# Altium PCB Relay.PcbDoc
Units mm, origin at the board's own origin, x right, y up, seen from the top; angles counter-clockwise.
Board outline 85.72 x 48.13 mm, 2 copper layers (Top Layer, Bottom Layer); 41 components, 40 nets, 181 pads, 0 vias.
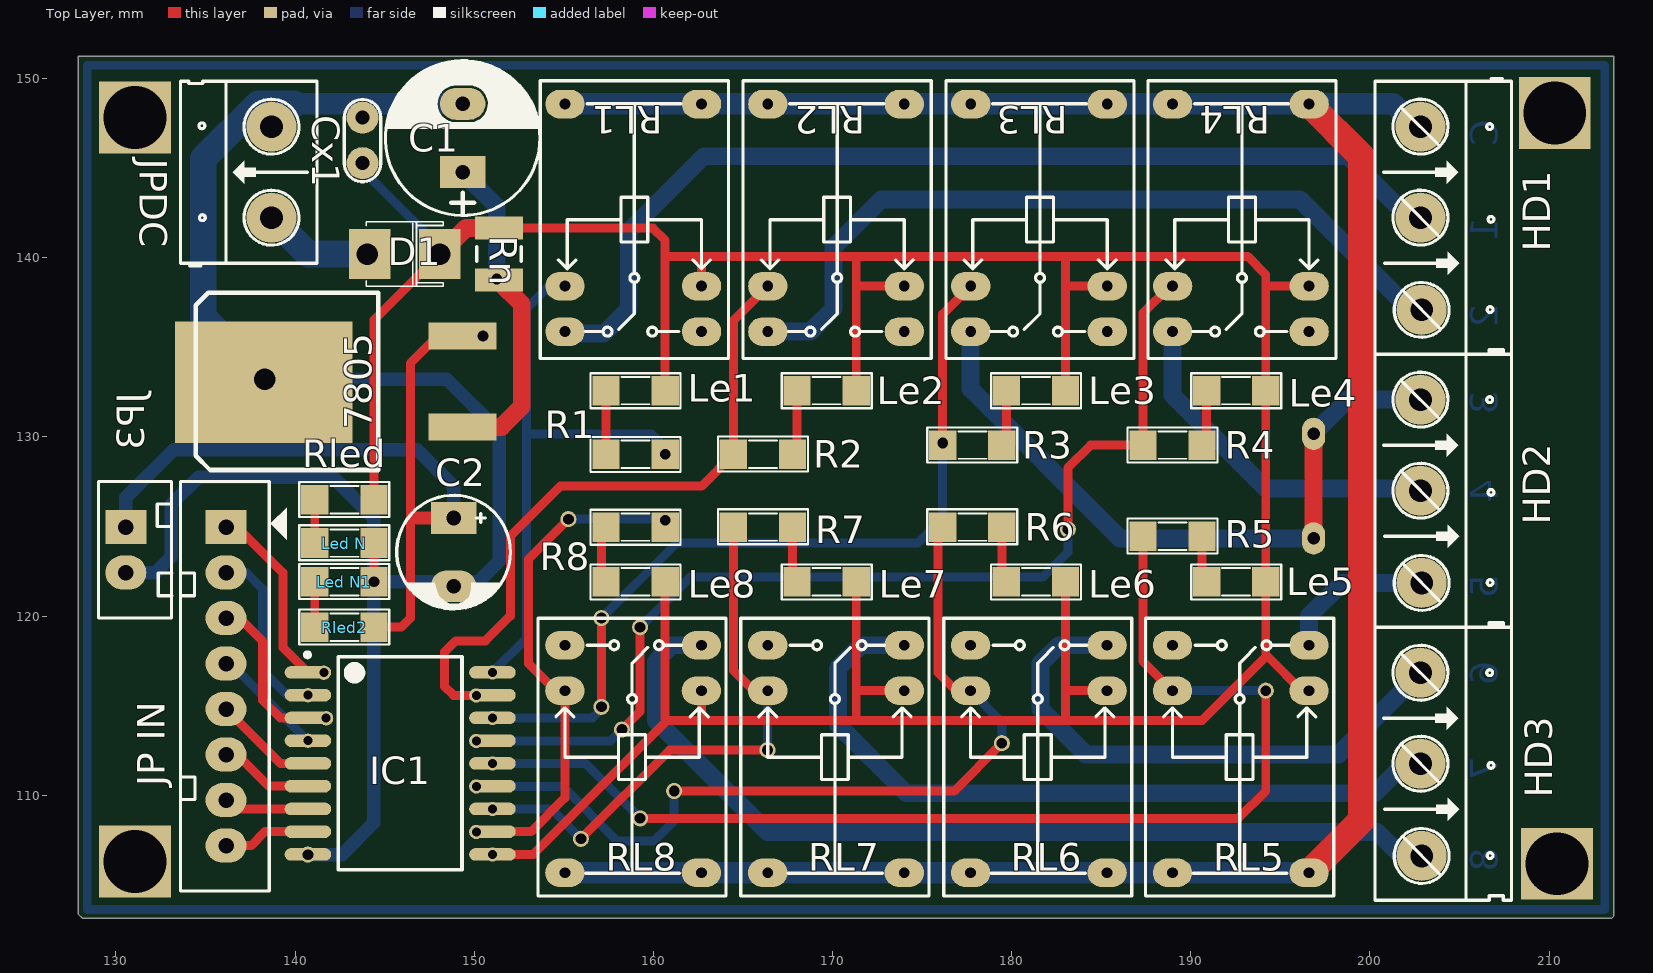
[diagram p0: Top Layer view]
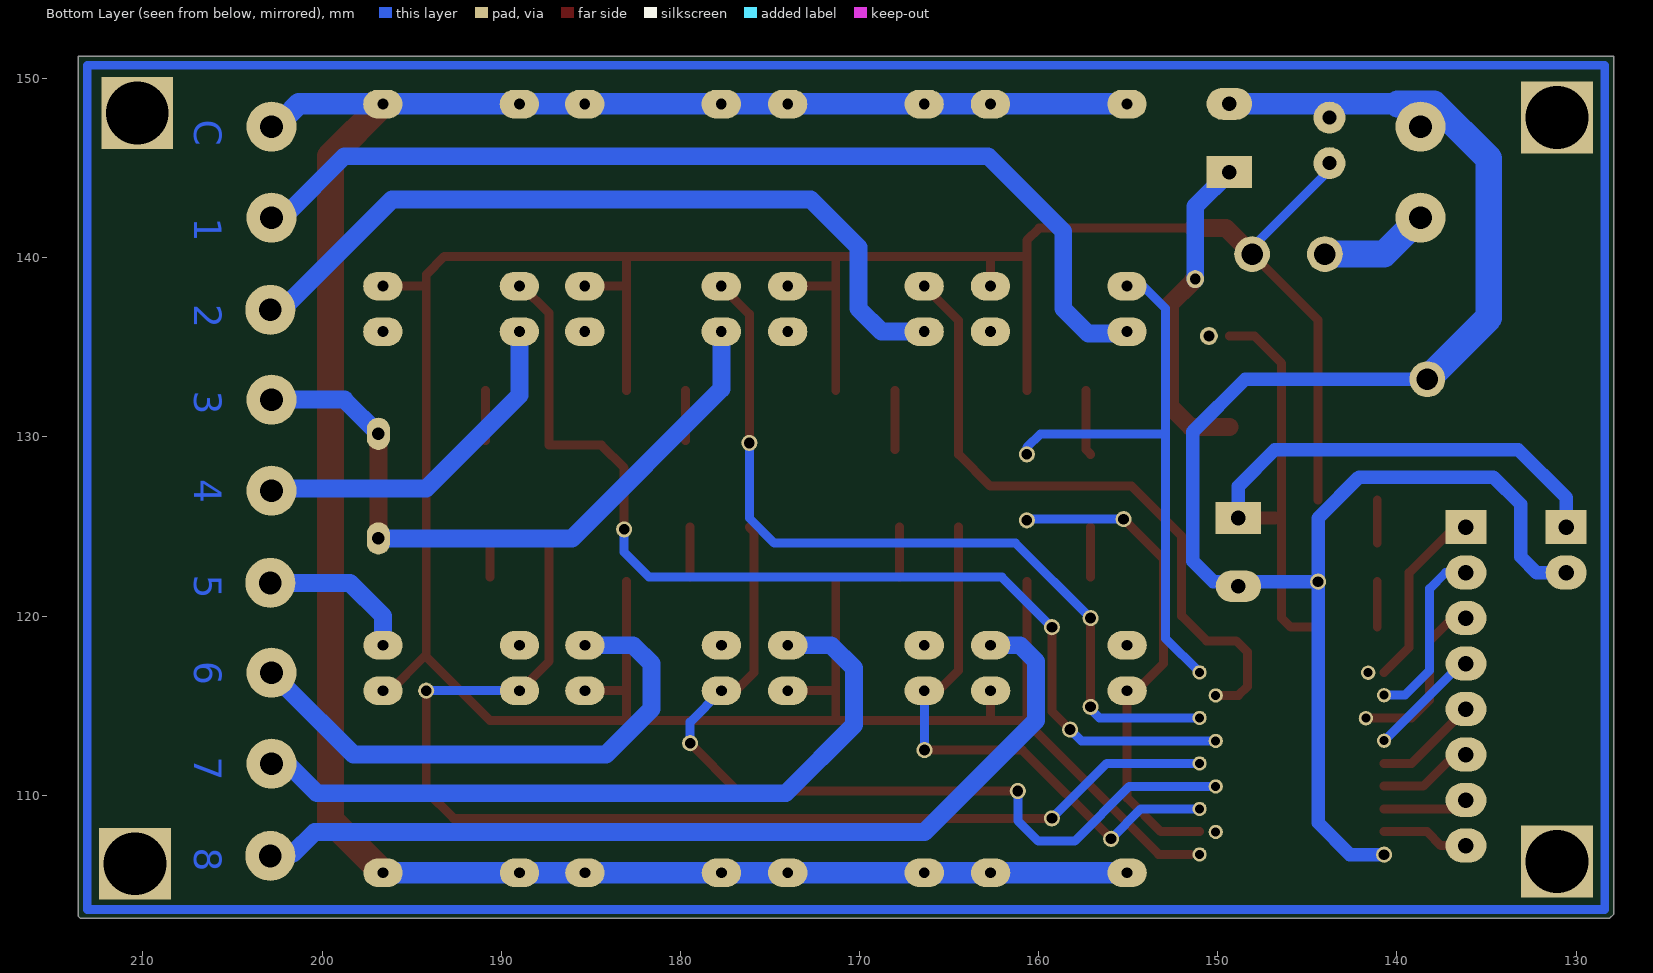
[diagram p1: Bottom Layer view, seen from below]
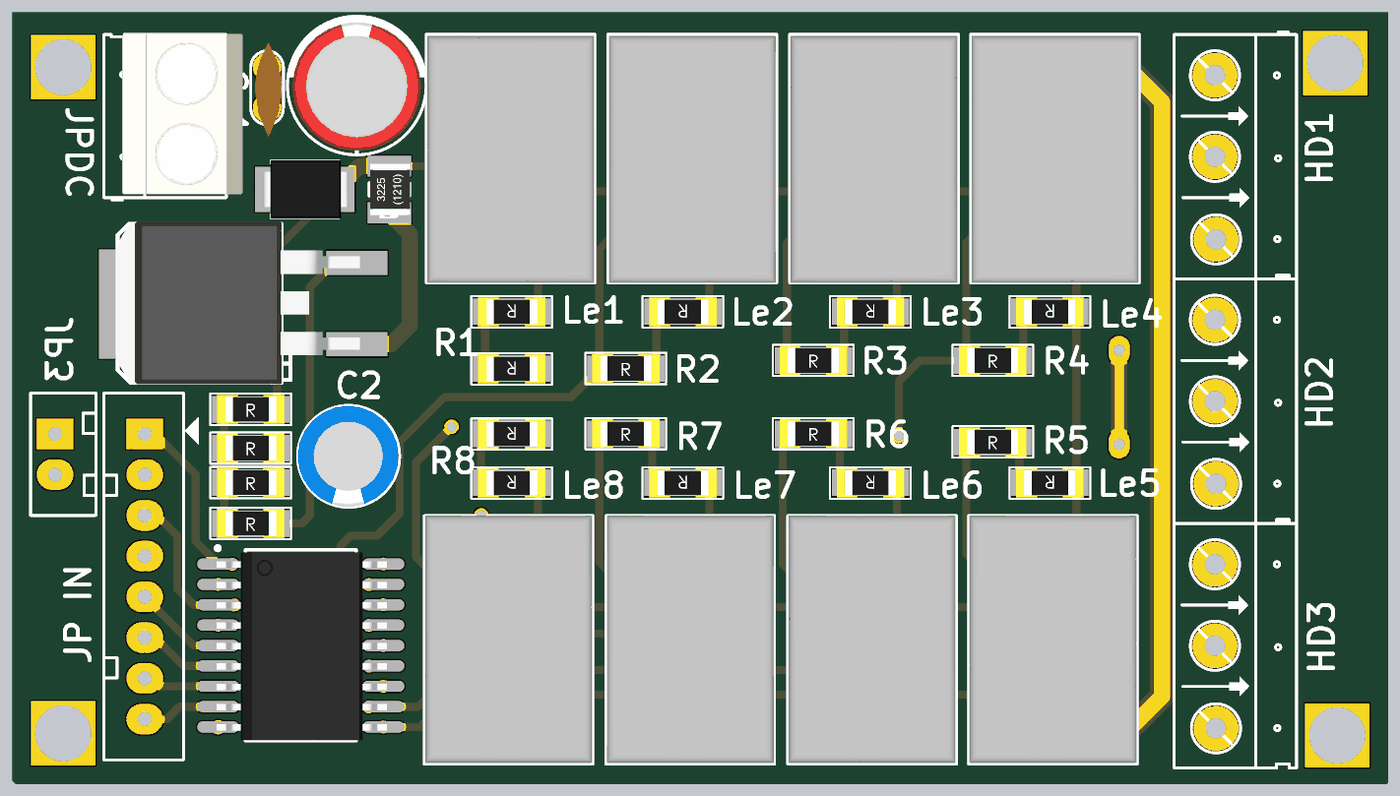
[diagram p2: 3D render of the assembled board from above, using the file's embedded part models]

## Layer stack, top to bottom
Top Layer: signal copper 0.0356
Dielectric: core 0.32, FR-4, Dk 4.8
Bottom Layer: signal copper 0.0356

## Board outline
127.889,151.257 213.614,151.257 213.614,103.251 213.487,103.124 208.153,103.124 128.143,103.124 127.889,103.378 127.889,151.257

## Design rules (kind name [scope] priority, off if disabled: settings)
AssemblyTestPointUsage AssemblyTestPointUsage_1 [All] p2:
AssemblyTestpoint AssemblyTestpoint_1 [All] p2: testpointundercomponent=TRUE minsize=1.016 maxsize=2.54 preferedsize=1.524 minholesize=0 maxholesize=1.016 preferedholesize=0.813 testpointgrid=0.025 usegrid=TRUE gridtolerance=0 allowsidetop=TRUE allowsidebottom=TRUE
Clearance [All] p1: gap=0.2
ComponentClearance ComponentClearance_1 [All] p2: gap=0.254 collisioncheckmode=3 verticalgap=0.254 showdistances=FALSE
DiffPairsRouting DiffPairsRouting_1 [All] p2: maxlimit=0.254 minlimit=0.254 mostfreqgap=0.254 maxuncoupledlength=12.7
FabricationTestPointUsage TestPointUsage [All] p2: valid=0 allowmultiple=FALSE
FabricationTestpoint Testpoint [All] p2: side=3 testpointundercomponent=TRUE minsize=1.016 maxsize=2.54 preferedsize=1.524 minholesize=0 maxholesize=1.016 preferedholesize=0.813 testpointgrid=0.025 allowsidetop=TRUE allowsidebottom=TRUE usegrid=TRUE gridtolerance=0
FanoutControl Fanout_LCC [IsLCC] p1: bgadir=Out bgaviamode=Centered fanoutstyle=Auto fanoutdirection=Alternating viagrid=0.025 // Fanout_LCC (Default Rule)
FanoutControl Fanout_BGA [IsBGA] p2: bgadir=Out bgaviamode=Centered fanoutstyle=Auto fanoutdirection=Alternating viagrid=0.025 // Fanout_BGA (Default Rule)
FanoutControl Fanout_Small [(CompPinCount < 5)] p3: bgadir=Out bgaviamode=Centered fanoutstyle=Auto fanoutdirection=OutThenIn viagrid=0.025 // Fanout_Small (Default Rule)
FanoutControl Fanout_SOIC [IsSOIC] p4: bgadir=Out bgaviamode=Centered fanoutstyle=Auto fanoutdirection=Alternating viagrid=0.025 // Fanout_SOIC (Default Rule)
FanoutControl Fanout_BGA_1 [IsBGA] p6: bgadir=Out bgaviamode=Centered fanoutstyle=Auto fanoutdirection=Alternating viagrid=0.025 // Fanout_BGA (Default Rule)
FanoutControl Fanout_LCC_1 [IsLCC] p7: bgadir=Out bgaviamode=Centered fanoutstyle=Auto fanoutdirection=Alternating viagrid=0.025 // Fanout_LCC (Default Rule)
FanoutControl Fanout_SOIC_1 [IsSOIC] p8: bgadir=Out bgaviamode=Centered fanoutstyle=Auto fanoutdirection=Alternating viagrid=0.025 // Fanout_SOIC (Default Rule)
FanoutControl Fanout_Small_1 [(CompPinCount < 5)] p9: bgadir=Out bgaviamode=Centered fanoutstyle=Auto fanoutdirection=OutThenIn viagrid=0.025 // Fanout_Small (Default Rule)
FanoutControl Fanout_Default_1 [All] p10: bgadir=Out bgaviamode=Centered fanoutstyle=Auto fanoutdirection=Alternating viagrid=0.025 // Fanout_Default (Default Rule)
Height Height_1 [All] p2: minheight=0 maxheight=25.4 prefheight=12.7
HoleSize HoleSize_1 [All] p2: absolutevalues=TRUE maxlimit=2.54 minlimit=0.025 maxpercent=80.000 minpercent=20.000
HoleToHoleClearance HoleToHoleClearance_1 [All] p2: gap=0.254 allowstackedmicrovias=TRUE
LayerPairs LayerPairs_1 [All] p2: enforce=TRUE
MinimumSolderMaskSliver MinimumSolderMaskSliver_1 [All] p2: minsoldermaskwidth=0.254
NetAntennae NetAntennae_1 [All] p2: netantennaetolerance=0
PasteMaskExpansion PasteMaskExpansion_1 [All] p2: expansion=0
PlaneClearance PlaneClearance_1 [All] p2: clearance=0.508
PolygonConnect [All] p1: connectstyle=Relief reliefconductorwidth=0.254 reliefentries=4 polygonreliefangle="90 Angle"
PolygonConnect PolygonConnect_1 [All] p2: connectstyle=Relief reliefconductorwidth=0.254 reliefentries=4 polygonreliefangle="90 Angle"
RoutingPriority RoutingPriority_1 [All] p2: routingpriority=0
RoutingTopology RoutingTopology_1 [All] p2: topology=Shortest
RoutingVias [All] p1: holewidth=0.6 width=1 viastyle="Through Hole" minholewidth=0.711 minwidth=1.27 maxholewidth=0.711 maxwidth=1.27
ShortCircuit ShortCircuit_1 [All] p2: allowed=FALSE
SilkToSilkClearance SilkToSilkClearance_1 [All] p2: silktosilkclearance=0.254
SilkscreenOverComponentPads [All] p1: minsilkscreentomaskgap=0.254
SilkscreenOverComponentPads SilkscreenOverComponentPads_1 [All] p2: minsilkscreentomaskgap=0.254
SolderMaskExpansion [All] p1: expansion=0.102
SolderMaskExpansion SolderMaskExpansion_1 [All] p2: expansion=0.102
UnRoutedNet UnRoutedNet_1 [All] p2:
Width [All] p1: maxlimit=1.5 minlimit=0.3 preferedwidth=1.5
23 further rules are at their usual default settings.

## Components (designator, comment, footprint, x,y, rotation, side; value= is the part's Value field where it differs from the comment)
7805 "Volt Reg" TO-263 149.352,130.556 r90 top
C1 "1000uF/16V" CP1.5/3.4 149.352,144.78 r90 top
C2 "100uF/35V" CP1.5/2.5 148.844,125.476 r270 top
Cx1 "33pF" CN1 143.764,147.828 r270 top
D1 "1N4007" "SM-DIODE 1A" 144.272,140.208 r0 top
HD1 "Header 3" HED3 202.819,147.32 r270 top
HD2 "Header 3" HED3 202.819,132.08 r270 top
HD3 "Header 3" HED3 202.819,116.84 r270 top
IC1 "ULN2803A" SO-18 140.716,116.84 r0 top
JP3 "JP2" CON2 130.556,124.968 r270 top
"JP IN" "JP8" CON8 136.144,124.968 r270 top
JPDC "JP2" HED2 138.684,142.24 r90 top
Le1 "LED" SM-1206 159.004,132.588 r180 top
Le2 "LED" SM-1206 169.672,132.588 r180 top
Le3 "LED" SM-1206 181.356,132.588 r180 top
Le4 "LED" SM-1206 192.532,132.588 r180 top
Le5 "LED" SM-1206 192.532,121.92 r180 top
Le6 "LED" SM-1206 181.356,121.92 r180 top
Le7 "LED" SM-1206 169.672,121.92 r180 top
Le8 "LED" SM-1206 159.004,121.92 r180 top
"Led N" "LED" SM-1206 142.748,124.079 r0 top
"Led N1" "LED" SM-1206 142.748,121.92 r0 top
R1 "10k" SM-1206 159.004,129.032 r180 top
R2 "10k" SM-1206 166.116,129.032 r0 top
R3 "10k" SM-1206 177.8,129.54 r0 top
R4 "10k" SM-1206 188.976,129.54 r0 top
R5 "10k" SM-1206 188.976,124.46 r0 top
R6 "10k" SM-1206 177.8,124.968 r0 top
R7 "10k" SM-1206 166.116,124.968 r0 top
R8 "10k" SM-1206 159.004,124.968 r180 top
RL1 "HK4100F" RL_SPDT_3A 162.687,138.43 r90 top
RL2 "HK4100F" RL_SPDT_3A 174.009,138.43 r90 top
RL3 "HK4100F" RL_SPDT_3A 185.331,138.43 r90 top
RL4 "HK4100F" RL_SPDT_3A 196.603,138.43 r90 top
RL5 "HK4100F" RL_SPDT_3A 188.976,115.824 r270 top
RL6 "HK4100F" RL_SPDT_3A 177.704,115.824 r270 top
RL7 "HK4100F" RL_SPDT_3A 166.382,115.824 r270 top
RL8 "HK4100F" RL_SPDT_3A 155.06,115.824 r270 top
Rled "1k" SM-1206 142.748,126.492 r0 top
Rled2 "1k" SM-1206 142.748,119.38 r0 top
Rn "100" SM-3225N 151.384,140.208 r90 top

## Footprints (in the part's own frame and the unit in brackets; to place one, negate y for a bottom-side part, rotate by r counter-clockwise, add the part's x,y. Pads: shape width x height; smd on the part's side, far side on the other; paste and mask are expansions set on the pad)
CN1 [mil]
  round 70 hole 31: 1(0,0) 2(100,0)
  silkscreen extent -40,-40 141,40, body extent -60,-30 170,37, height 265
CON2 [mil] "CON2"
  rect 75x90 hole 34: 1(0,0)
  oval 75x90 hole 34: 2(100,0)
  silkscreen extent -100,-60 200,101
CON8 [mil] "CON8"
  rect 75x90 hole 34: 1(0,0)
  oval 75x90 hole 34: 2(100,0) 3(200,0) 4(300,0) 5(400,0) 6(500,0) 7(600,0) 8(700,0)
  silkscreen extent -100,-100 800,133
CP1.5/2.5 [mil] "Tu hoa 33 >100 uF,50V, 220uF/16V,25V ( it su dung )"
  rect 70x100 hole 32: 1(0,0)
  oval 70x100 hole 32: 2(150,0)
  silkscreen extent -50,-125 200,125, body extent -49,-125 199,123, height 422
CP1.5/3.4 [mil] "Tu hoa 220->470uF,16V, 470uF/16V,25V"
  rect 70x100 hole 32: 1(0,0)
  oval 70x100 hole 32: 2(150,0)
  silkscreen extent -95,-170 245,170, body extent -85,-157 230,157, height 446
HED2 [mil] "Header 2, 2 pin, hight 300mil, Pin to Pin 200, Colour Green"
  round 110 hole 50: 1(0,0) 2(200,0)
  silkscreen extent -106,-100 300,200, body extent -92,-140 302,155, height 394
HED3 [mil] "Header 3, 3 pin, hight 300mil, Pin to Pin 200, Colour Green"
  round 110 hole 50: 1(0,0) 2(200,0) 3(402.62,2.62)
  silkscreen extent -106,-100 500,200
RL_SPDT_3A [mm] "6 PIN RL"
  oval 1.6x2.2 hole 0.6: 1(-2.55,0) 2(-0.01,0) 3(10.15,0) 4(10.15,7.62) 5(-0.01,7.62) 6(-2.55,7.62)
  silkscreen extent -4.05,-1.5 11.45,9, body extent -4.05,-1.45 11.35,8.95, height 2.5
SM-1206 [mil] "Compoment SMD 120x60mil"
  rect 60x65 smd: 1(-65,0) 2(65,0)
  silkscreen extent -99,-38 99,39, body extent -83,-35 83,36, height 25
SM-3225N [mm] "Chip Capacitor, Body 3.2x2.5mm, IPC Medium Density"
  rect 1.3x2.7 smd: 1(-1.45,0) 2(1.45,0)
  silkscreen extent -0.4,-1.25 0.4,1.25, body extent -1.6,-1.3 1.6,1.2, height 0.55
"SM-DIODE 1A" [mm] "M7"
  rect 2.3x2.8 smd: 1(-0.1,0) 2(3.8,0)
  silkscreen extent -0.3,-1.8 4,1.8, body extent -0.75,-1.8 4.55,1.8, height 2.4
SO-18 [mm] "SOIC-18-300"
  oval 2.6x0.7 smd: 1(0,0.015) 2(0,-1.255) 3(0,-2.525) 4(0,-3.795) 5(0,-5.065) 6(0,-6.335) 7(0,-7.605) 8(0,-8.875) 9(0,-10.145) 10(10.3,-10.145) 11(10.3,-8.875) 12(10.3,-7.605) 13(10.3,-6.335) 14(10.3,-5.065) 15(10.3,-3.795) 16(10.3,-2.525) 17(10.3,-1.255) 18(10.3,0.015)
  silkscreen extent -0.15,-11 8.6,1.12, body extent -0.1,-10.97 10.5,0.77, height 2.67
TO-263 [mm] "SMD-DPAK"
  rect 1.5x3.8 smd: 1(0,0) 3(5.08,0)
  rect 6.8x9.9 smd: 2(2.5,11.1)
  silkscreen extent -2.4,4.7 7.5,14.9, body extent -2.5,-0.23 7.66,15.03

## Part data
7805: "Voltage Regulator"
C1: library part CP4, "Cap 1000uF/16V - 220uF/50V"
C2: library part CP3, "Cap 100uF/35V - 470uF/16V"
Cx1: library part CN0, "Cremic For Xtal 1pF => 100pF"
HD1 HD2 HD3: library part Hed3, "Header 3 (Green)"
IC1: "High-Voltage, High-Current Darlington Array"
JP3 JPDC: library part Con2, "Connector 2"
"JP IN": library part Con8, "Connector 8"
Le1 Le2 Le3 Le4 Le5 Le6 Le7 Le8 "Led N" "Led N1": "LED Single colour Green and Red"
R1 R2 R3 R4 R5 R6 R7 R8 Rled Rled2: library part R1/4W, "Resistor 1/4W"
RL1 RL2 RL3 RL4 RL5 RL6 RL7 RL8: library part "Relay 3", "HK4100F-12V"
Rn: library part R1W, "Resistor 1W"

## Free pads (board coordinates)
  oval 1.3x1.8 hole 0.7: 0(196.85,130.175) 1(196.85,124.333)
  rect 4x4 hole 3.5: 0(210.312,148.082) 1(210.439,106.172) 2(131.064,106.299) 3(131.064,147.828)
  round 2 hole 1.2: 1(144.018,140.208) 2(148.082,140.208) 3(138.303,133.223)
  round 0.9 hole 0.6: 1(144.399,121.92) 2(183.134,124.841) 4(140.716,106.68) 5(194.183,115.834) 6(159.258,108.712) 7(179.451,112.903) 8(161.163,110.236) 9(166.37,112.522) 10(155.956,107.569) 11(160.655,129.032) 12(158.242,113.665) 13(159.258,119.38) 15(157.099,114.935) 16(157.099,119.888) 17(176.149,129.667) 18(155.257,125.412) 19(160.655,125.349)
  round 0.8 hole 0.5: 4(140.716,113.045) 5(141.732,114.3) 6(140.716,115.585) 7(141.605,116.84) 8(151.016,116.855) 9(150.114,115.57) 10(151.016,114.315) 11(150.114,113.03) 12(151.016,111.775) 13(150.114,110.49) 14(151.016,109.235) 15(150.114,107.95) 16(151.016,106.695)
  round 1 hole 0.6: 4(150.495,135.636) 5(151.257,138.811)

## Nets (pads, with @x,y where several pads share a name; then routed paths per layer and width w, separated by ;. In a path a pad name is that pad's centre, name@x,y a point inside that pad or via, vN(x,y) a via of type N, cw(c..) or ccw(c..) an arc to the next point about the centre after c; other vN are vias at no path point)
GND: 7805.2 "Led N1.2" "Led N.2" C1.2 C2.2 Cx1.1 IC1.9 JP3.2 JPDC.2 pad.1@144.399,121.92 pad.3@138.303,133.223 pad.4@140.716,106.68 | length 100.8
  Top Layer w0.5: pad.1@144.399,121.92 144.399,124.079
  Bottom Layer w0.75: JP3.2 132.207,122.428 133.096,123.317 133.096,126.238 134.62,127.762 142.113,127.762 144.399,125.476 pad.1@144.399,121.92 ; pad.3@138.303,133.223 148.463,133.223 151.384,130.302 151.384,123.063 150.241,121.92 pad.1@144.399,121.92 ; pad.4@140.716,106.68 142.621,106.68 144.399,108.458 pad.1@144.399,121.92
  Bottom Layer w1.2: 139.954,148.59 C1.2
  Bottom Layer w1.5: pad.3@138.303,133.223 134.874,136.652 134.874,145.542 137.922,148.59 139.954,148.59
Net7805_1: 7805.1 C1.1 pad.5@151.257,138.811 Rn.1 | length 18.1
  Top Layer w1: 7805.1 149.86,130.556 151.511,130.556 152.654,131.699 152.654,137.414 151.384,138.684 Rn.1
  Bottom Layer w1: C1.1 151.257,142.875 pad.5@151.257,138.811
Net7805_3: 7805.3 C2.1 JP3.1 pad.4@150.495,135.636 Rled2.2 | length 45.7
  Top Layer w0.5: Rled2.2 145.923,119.38 146.431,119.888 146.431,134.112 147.955,135.636 7805.3
  Top Layer w0.75: 146.812,125.476 C2.1
  Bottom Layer w0.75: JP3.1 130.556,126.619 133.223,129.286 146.812,129.286 148.844,127.254 C2.1
NetD1_1: D1.1 JPDC.1 pad.1@144.018,140.208 | length 6
  Bottom Layer w1.5: JPDC.1 140.716,140.208 pad.1@143.891,140.208
NetHD1_1: HD1.1 RL1.3 RL1.4 RL2.3 RL2.4 RL3.3 RL3.4 RL4.3 RL4.4 RL5.3 RL5.4 RL6.3 RL6.4 RL7.3 RL7.4 RL8.3 RL8.4 | length 134.8
  Top Layer w1.5: RL5.4 199.517,108.595 199.517,145.669 RL4.3@196.606,148.58
  Bottom Layer w1.2: RL8.3@154.813,105.674 RL5.4 ; RL1.4@155.067,148.59 201.295,148.59 202.057,147.828 HD1.1@202.057,147.447
NetHD1_2: HD1.2 RL1.6 | length 54.5
  Bottom Layer w1: RL1.6@155.575,135.763 157.226,135.763 158.623,137.16 158.623,141.478 162.814,145.669 198.755,145.669 HD1.2@202.057,142.367
NetHD1_3: HD1.3 RL2.6 | length 43.3
  Bottom Layer w1: RL2.6 168.773,135.88 170.053,137.16 170.053,140.589 172.72,143.256 196.088,143.256 HD1.3@202.124,137.22
NetHD2_1: HD2.1 pad.0@196.85,130.175 pad.1@196.85,124.333 RL3.6 | length 38.4
  Top Layer w1: pad.1@196.85,124.333 pad.0@196.85,130.175
  Bottom Layer w1: RL3.6 177.711,132.677 186.055,124.333 pad.1@196.85,124.333 ; pad.0@196.85,130.175 198.755,132.08 HD2.1
NetHD2_2: HD2.2 RL4.6 | length 18.7
  Bottom Layer w1: RL4.6 188.983,132.327 194.183,127.127 201.676,127.127 HD2.2@201.923,126.88
NetHD2_3: HD2.3 RL5.6 | length 8.7
  Bottom Layer w1: RL5.6 196.596,120.015 198.434,121.853 HD2.3
NetHD3_1: HD3.1 RL6.6 | length 30.6
  Bottom Layer w1: RL6.6 182.636,118.374 181.61,117.348 181.61,114.808 184.15,112.268 198.247,112.268 202.057,116.078 HD3.1@202.057,116.967
NetHD3_2: HD3.2 RL7.6 | length 41.5
  Bottom Layer w1: RL7.6 171.587,118.374 170.307,117.094 170.307,113.919 174.117,110.109 200.279,110.109 HD3.2@202.057,111.887
NetHD3_3: HD3.3 RL8.6 | length 51.3
  Bottom Layer w1: RL8.6 161.046,118.374 160.147,117.475 160.147,114.173 166.37,107.95 200.406,107.95 201.616,106.74 HD3.3@202.124,106.74
NetIC1_1: "JP IN.1" IC1.1 pad.7@141.605,116.84 | length 10.4
  Top Layer w0.5: 136.144,124.968 136.779,124.968 139.319,122.428 139.319,118.252 IC1.1
NetIC1_2: "JP IN.2" IC1.2 pad.6@140.716,115.585 | length 10.1
  Bottom Layer w0.5: 136.144,122.428 137.287,122.428 138.176,121.539 138.176,116.967 139.558,115.585 pad.6@140.716,115.585
NetIC1_3: "JP IN.3" IC1.3 pad.5@141.732,114.3 | length 9.8
  Top Layer w0.5: 136.144,119.888 136.906,119.888 138.176,118.618 138.176,115.316 139.192,114.3 pad.5@141.732,114.3
NetIC1_4: "JP IN.4" IC1.4 pad.4@140.716,113.045 | length 6.4
  Bottom Layer w0.5: 136.144,117.348 136.413,117.348 pad.4@140.716,113.045
NetIC1_5: "JP IN.5" IC1.5 | length 5.8
  Top Layer w0.5: 136.144,114.808 139.177,111.775 IC1.5
NetIC1_6: "JP IN.6" IC1.6 | length 5.3
  Top Layer w0.5: 136.144,112.268 136.779,112.268 138.542,110.505 IC1.6
NetIC1_7: "JP IN.7" IC1.7 | length 4.8
  Top Layer w0.5: 136.144,109.728 136.637,109.235 IC1.7
NetIC1_8: "JP IN.8" IC1.8 | length 4.9
  Top Layer w0.5: 136.144,107.188 137.541,107.188 138.318,107.965 IC1.8
NetIC1_11: IC1.11 pad.15@150.114,107.95 pad.18 pad.19 R8.1 RL8.2 | length 27.5
  Top Layer w0.5: IC1.11 153.177,107.965 155.06,109.848 155.06,115.323 153.035,117.348 153.035,123.19 pad.18
  Bottom Layer w0.5: pad.18 pad.19@160.591,125.412
NetIC1_12: IC1.12 pad.9@166.37,112.522 pad.10@155.956,107.569 pad.14 R7.1 RL7.2 | length 31.8
  Top Layer w0.5: pad.10@155.956,107.569 160.909,112.522 pad.9@166.37,112.522 ; R7.1 164.465,116.967 165.598,115.834 RL7.2
  Bottom Layer w0.5: pad.14 154.29,109.235 pad.10@155.956,107.569 ; pad.9@166.382,112.534 RL7.2
NetIC1_13: IC1.13 pad.7@179.451,112.903 pad.8@161.163,110.236 pad.13@150.114,110.49 R6.1 RL6.2 | length 47.9
  Top Layer w0.5: pad.8@161.163,110.236 176.784,110.236 pad.7@179.451,112.903 ; R6.1 175.895,124.714 175.895,116.84 176.901,115.834 RL6.2
  Bottom Layer w0.5: pad.13@150.114,110.49 154.94,110.49 157.988,107.442 160.02,107.442 161.163,108.585 pad.8@161.163,110.236 ; RL6.2 179.451,114.087 pad.7@179.451,112.903
NetIC1_14: IC1.14 pad.5@194.183,115.834 pad.6@159.258,108.712 pad.12@151.016,111.775 R5.1 RL5.2 | length 65.2
  Top Layer w0.5: pad.6@159.258,108.712 192.659,108.712 194.183,110.236 pad.5@194.183,115.834 ; R5.1 187.325,117.485 RL5.2
  Bottom Layer w0.5: pad.12@151.016,111.775 156.195,111.775 pad.6@159.258,108.712 ; RL5.2 pad.5@194.183,115.834
NetIC1_15: IC1.15 pad.2@183.134,124.841 pad.11@150.114,113.03 pad.12@158.242,113.665 pad.13@159.258,119.38 R4.1 RL4.5 | length 59.3
  Top Layer w0.5: pad.12@158.369,113.538 158.369,113.792 159.258,114.681 pad.13@159.258,119.38 ; pad.2@183.134,124.841 183.134,128.27 184.404,129.54 R4.1 187.325,136.906 188.839,138.42 RL4.5
  Bottom Layer w0.5: pad.11@150.114,113.03 157.607,113.03 pad.12@158.242,113.665 ; pad.13@159.258,119.38 162.052,122.174 181.737,122.174 183.134,123.571 pad.2@183.134,124.841
NetIC1_16: IC1.16 pad.10@151.016,114.315 pad.15@157.099,114.935 pad.16@157.099,119.888 pad.17 R3.1 RL3.5 | length 46.2
  Top Layer w0.5: pad.15@157.099,114.935 pad.16@157.099,119.761 ; R3.1 176.149,136.858 RL3.5
  Bottom Layer w0.5: pad.10@151.016,114.315 156.606,114.315 pad.15@157.099,114.808 ; pad.16@157.099,119.888 161.29,124.079 174.752,124.079 176.149,125.476 pad.17
NetIC1_17: IC1.17 pad.9@150.114,115.57 R2.1 RL2.5 | length 37.4
  Top Layer w0.5: pad.9@150.114,115.57 148.844,115.57 148.336,116.078 148.336,117.983 148.971,118.618 150.622,118.618 152.019,120.015 152.019,124.46 154.813,127.254 162.687,127.254 R2.1 164.465,136.496 RL2.5
NetIC1_18: IC1.18 pad.8@151.016,116.855 pad.11@160.655,129.032 R1.1 RL1.5 | length 33.4
  Top Layer w0.5: RL1.5@154.676,138.42 RL1.5
  Bottom Layer w0.5: pad.8@151.016,116.855 152.908,118.747 152.908,137.16 154.168,138.42 RL1.5@155.839,138.42 ; 152.908,130.175 159.893,130.175 160.655,129.413 pad.11@160.655,129.032
NetLe1_2: Le1.2 R1.2 | length 3.7
  Top Layer w0.5: R1.2@157.099,129.032 157.353,129.286 Le1.2
NetLe2_2: Le2.2 R2.2 | length 3.3
  Top Layer w0.5: R2.2@168.021,129.286 Le2.2
NetLe3_2: Le3.2 R3.2 | length 2.8
  Top Layer w0.5: R3.2@179.705,129.794 Le3.2
NetLe4_2: Le4.2 R4.2 | length 2.8
  Top Layer w0.5: R4.2@190.881,129.794 Le4.2
NetLe5_2: Le5.2 R5.2 | length 2.3
  Top Layer w0.5: Le5.2@190.627,122.174 R5.2
NetLe6_2: Le6.2 R6.2 | length 2.8
  Top Layer w0.5: Le6.2@179.451,122.174 R6.2
NetLe7_2: Le7.2 R7.2 | length 2.8
  Top Layer w0.5: Le7.2@167.767,122.174 R7.2
NetLe8_2: Le8.2 R8.2 | length 2.8
  Top Layer w0.5: Le8.2@157.099,122.174 R8.2@157.099,124.968
"NetLed N1_1": "Led N1.1" Rled2.1 | length 2.5
  Top Layer w0.5: Rled2.1 141.097,121.92
"NetLed N_1": "Led N.1" Rled.1 | length 2.4
  Top Layer w0.5: 141.097,124.079 Rled.1
VCC: Cx1.2 D1.2 IC1.10 Le1.1 Le2.1 Le3.1 Le4.1 Le5.1 Le6.1 Le7.1 Le8.1 pad.2@148.082,140.208 pad.16@151.016,106.695 RL1.2 RL2.2 RL3.2 RL4.2 RL5.5 RL6.5 RL7.5 RL8.5 Rled.2 Rn.2 | length 204.2
  Top Layer w0.5: Rled.2 144.399,136.525 pad.2@148.082,140.208 ; Rn.2 159.967,141.658 160.655,140.97 Le1.1 ; IC1.10@151.524,106.695 153.304,106.695 160.782,114.173 183.007,114.173 ; 160.655,114.3 Le8.1 ; 160.655,139.954 160.782,140.081 162.687,140.081 ; 162.68,114.293 RL8.5 ; RL1.2 162.687,140.081 ; 171.323,114.3 171.323,115.834 ; Le7.1 171.323,115.834 ; Le2.1 171.323,138.42 ; RL7.5 171.323,115.834 ; RL2.2 171.323,138.42 ; Le6.1 183.007,115.834 ; Le3.1 183.007,138.42 ; 183.007,139.954 183.007,138.42 ; RL6.5 183.007,115.834 ; RL3.2 183.007,138.42 ; 194.183,117.729 190.627,114.173 183.007,114.173 ; RL5.5@196.342,115.697 194.183,117.856 Le5.1 Le4.1 194.183,138.42 ; RL4.2 194.183,138.42 ; 162.687,140.081 171.323,140.081 ; 171.323,138.42 171.323,140.081 ; 171.323,140.081 193.167,140.081 194.183,139.065 194.183,138.42 ; 183.007,114.173 183.007,115.834
  Top Layer w1: pad.2@148.082,140.208 149.532,141.658 Rn.2
  Bottom Layer w0.5: Cx1.2@143.637,145.034 148.018,140.653 147.447,140.208 148.082,140.208 pad.2@147.828,140.716
pads on no net: RL1.1 RL2.1 RL3.1 RL4.1 RL5.1 RL6.1 RL7.1 RL8.1
copper on no net: | length 263.7
  Bottom Layer w0.5: 128.397,103.632 128.397,150.749 213.106,150.749 213.106,103.632 128.397,103.632

## Other copper
Bottom Layer:
  text "C" at 207.137,147.701 h1.52 r90
  text "1" at 207.137,142.24 h1.52 r90
  text "2" at 207.137,137.414 h1.52 r90
  text "3" at 207.137,132.588 h1.52 r90
  text "4" at 207.137,127.635 h1.52 r90
  text "5" at 207.137,122.301 h1.52 r90
  text "6" at 207.137,117.475 h1.52 r90
  text "7" at 207.137,112.141 h1.52 r90
  text "8" at 207.137,107.061 h1.52 r90

## Silkscreen, mask and mechanical layers (free items; w line width, h text height)
Top Solder:
  lines w0.6: 196.596,105.674 196.606,105.674 ; 196.603,148.58 196.606,148.58 ; 196.85,130.175 196.85,124.714 197.104,124.46
  lines w1: 196.606,105.674 199.517,108.585 199.517,145.669 196.606,148.58
Bottom Solder:
  lines w0.6: 162.68,105.674 162.697,105.674 ; 177.704,118.374 178.679,118.374 ; 185.331,135.852 185.331,135.88 ; 188.976,118.374 188.986,118.374 ; 195.971,105.674 196.596,106.299 196.596,105.674 ; 201.683,126.88 201.803,127 ; 201.93,137.414 202.184,137.414 ; 202.311,116.332 202.311,116.967
  lines w1: 155.06,105.674 162.68,105.674 195.971,105.674 ; 155.067,148.58 201.559,148.58 202.819,147.32 ; 155.448,135.763 157.226,135.763 158.623,137.16 158.623,141.478 162.814,145.669 198.755,145.669 201.803,142.621 ; 162.052,118.364 161.036,118.364 160.147,117.475 160.147,114.173 166.37,107.95 195.961,107.95 201.041,107.95 202.692,106.299 ; 166.389,135.88 168.773,135.88 170.053,137.16 170.053,140.589 172.72,143.256 196.088,143.256 201.93,137.414 ; 173.355,118.364 171.577,118.364 170.307,117.094 170.307,113.919 174.117,110.109 201.041,110.109 202.438,111.506 ; 177.673,135.88 177.673,132.715 186.055,124.333 196.85,124.333 ; 184.658,118.364 182.626,118.364 181.61,117.348 181.61,114.935 184.277,112.268 188.087,112.268 198.247,112.268 202.311,116.332 ; 188.983,135.88 188.983,132.327 194.183,127.127 202.565,127.127 ; 196.596,118.374 196.596,120.015 198.434,121.853 202.886,121.853 ; 196.85,130.175 198.755,132.08 202.819,132.08
Mechanical 16:
  drawing of 1873 lines, arcs and shapes, not listed
  text "1" at 36.246,189.611 h1.78
  text "2" at 108.89,189.611 h1.78
  text "3" at 182.042,189.611 h1.78
  text "4" at 254.94,189.611 h1.78
  text "A" at 1.905,166.599 h1.78
  text "A" at 288.925,166.599 h1.78
  text "B" at 1.905,118.542 h1.78
  text "B" at 288.925,118.542 h1.78
  text "C" at 1.905,70.028 h1.78
  text "ENGINEER:" at 173.99,33.02 h1.14
  text "TITLE:" at 212.09,33.02 h1.14
  text "PCB DESIGNER:" at 173.99,25.527 h1.14
  text "D" at 1.905,22.022 h1.78
  text "D" at 288.925,22.022 h1.78
  text "DATE:" at 173.99,17.78 h1.14
  text "PART NO.:" at 212.09,17.78 h1.14
  text "REV:" at 265.43,17.78 h1.14
  text "Altium Limited" at 140.97,15.24 h1.78
  text ".PRINT_DATE" at 175.26,14.732 h1.78
  text "12a Rodborough Rd" at 140.97,12.7 h1.78
  text "Frenchs Forest" at 140.97,10.16 h1.78
  text "FILE NAME:" at 173.99,10.16 h1.14
  text "DWG NO:" at 212.09,10.16 h1.14
  text "SCALE:" at 265.43,10.16 h1.14
  text "NSW 2086" at 140.97,7.62 h1.78
  text ".PCB_FILE_NAME_NO_PATH" at 175.26,7.112 h1.78
  text "1" at 36.246,1.651 h1.78
  text "2" at 108.89,1.651 h1.78
  text "3" at 182.042,1.651 h1.78
  text "4" at 254.94,1.651 h1.78